# Altium PCB MainboardPCB.PcbDoc
Units mil, origin at the board's own origin, x right, y up, seen from the top; angles counter-clockwise.
Board outline 13697.5 x 3947.5 mil, 2 copper layers (Top Layer, Bottom Layer), stack 38.189 mil thick; 192 components, 125 nets, 843 pads, 0 vias.
Unrouted connection lines stored in the file: 319.
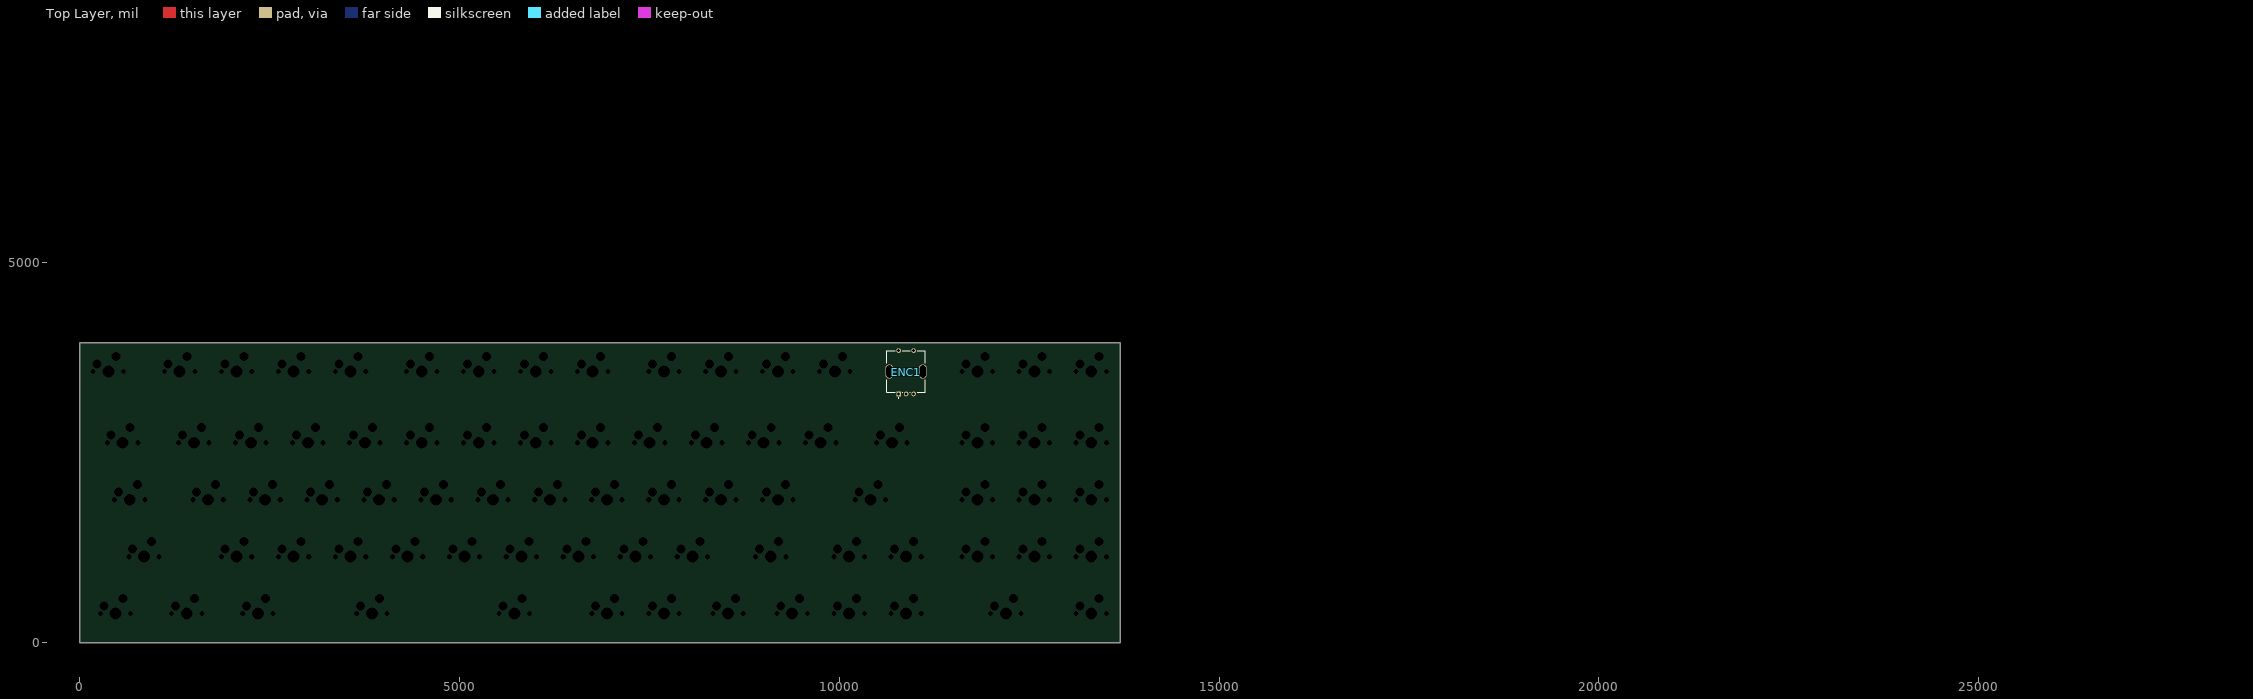
[diagram p0: Top Layer view]
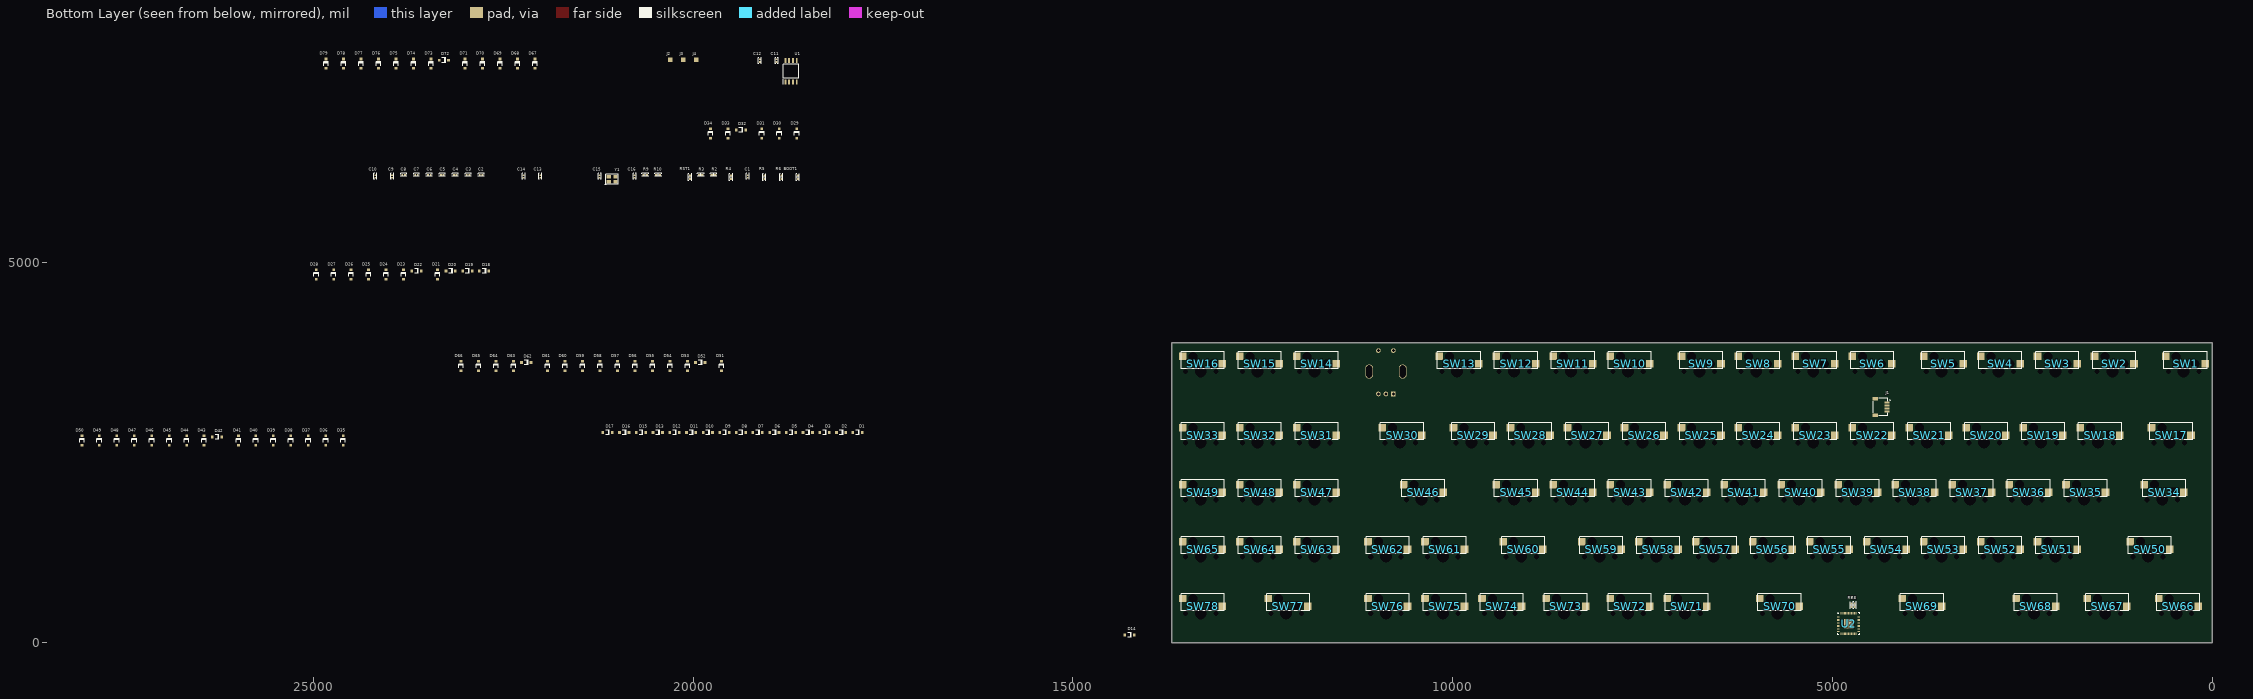
[diagram p1: Bottom Layer view, seen from below]

## Layer stack, top to bottom
Top Solder: solder mask 0.8, Solder Resist, Dk 3.8
Top Layer: signal copper 1.378
Dielectric: core 35.433, FR-4, Dk 4.6
Bottom Layer: signal copper 1.378
Bottom Solder: solder mask 0.8, Solder Resist, Dk 3.8

## Board outline
0,0 0,3947.5 13697.5,3947.5 13697.5,0

## Design rules (kind name [scope] priority, off if disabled: settings)
BoardOutlineClearance [All] p1: gap=7.87 ignorepadtopadclearanceinfootprint=FALSE
Clearance [All] p1: gap=5 ignorepadtopadclearanceinfootprint=FALSE except(9.84: Arc-Hole Track-Hole SMDPad-Hole THPad-Hole Via-Hole Fill-Hole Poly-Hole Region-Hole Text-Hole)
ComponentClearance [All] p1: gap=5 collisioncheckmode=3 verticalgap=5 showdistances=TRUE
DiffPairsRouting DiffPairsRouting_USB [InDifferentialPairClass('USB_Lines')] p1: maxlimit=6 minlimit=6 mostfreqgap=6 toplayer_minwidth=8 toplayer_maxwidth=31.5 toplayer_prefwidth=19.81 bottomlayer_minwidth=8 bottomlayer_maxwidth=31.5 bottomlayer_prefwidth=19.81 impedanceprofiledriven=TRUE impedanceprofileid={2B0FFD2A-F9F9-4E3F-BCA0-48B2AC724217} impedanceprofilevalue=90.000000 maxuncoupledlength=500
DiffPairsRouting [All] p2: maxlimit=10 minlimit=5 mostfreqgap=5 toplayer_minwidth=5 toplayer_maxwidth=1000 toplayer_prefwidth=5 bottomlayer_minwidth=5 bottomlayer_maxwidth=1000 bottomlayer_prefwidth=5 maxuncoupledlength=500
Height [All] p1: minheight=0 maxheight=71497.94 prefheight=500
HoleSize [All] p1: absolutevalues=TRUE maxlimit=248.03 minlimit=11.81 maxpercent=80.000 minpercent=20.000
HoleToHoleClearance [All] p1: gap=9.84 allowstackedmicrovias=FALSE
MinimumAnnularRing [All] p1: minimumring=3
MinimumSolderMaskSliver [All] p1: minsoldermaskwidth=0
PlaneClearance [All] p1: clearance=5
PlaneConnect PlaneConnectPowerPads [InPadClass('PowerPads')] p1: planeconnectstyle=Direct reliefexpansion=20 reliefentries=4 reliefconductorwidth=10 reliefairgap=10
PlaneConnect [All] p2: pad.planeconnectstyle=Relief pad.reliefexpansion=11.81 pad.reliefentries=4 pad.reliefconductorwidth=5 pad.reliefairgap=5 via.planeconnectstyle=Direct via.reliefexpansion=11.81 via.reliefentries=4 via.reliefconductorwidth=5 via.reliefairgap=5
PolygonConnect PolygonConnectPowerPads [All vs (InPadClass('PowerPads'))] p1: connectstyle=Direct reliefconductorwidth=10 reliefentries=4 polygonreliefangle="90 Angle" airgapwidth=10
PolygonConnect [All] p2: thpad.connectstyle=Relief thpad.reliefconductorwidth=5 thpad.reliefentries=4 thpad.polygonreliefangle="90 Angle" thpad.airgapwidth=5 smdpad.connectstyle=Relief smdpad.reliefconductorwidth=5 smdpad.reliefentries=4 smdpad.polygonreliefangle="90 Angle" smdpad.airgapwidth=5 via.connectstyle=Direct via.reliefconductorwidth=5 via.reliefentries=4 via.polygonreliefangle="90 Angle" via.airgapwidth=5
RoutingVias [All] p1: holewidth=11.81 width=23.62 viastyle="Through Hole" minholewidth=11.81 minwidth=23.62 maxholewidth=23.62 maxwidth=259.84
SilkToSilkClearance [All] p1: silktosilkclearance=0
SilkToSolderMaskClearance [IsPad] p1: minsilkscreentomaskgap=5 clearancetoexposedcopper=TRUE
SolderMaskExpansion [All] p1: expansion=2.95 istentingtop=FALSE
UnRoutedNet [All] p1: checkbadconnections=TRUE
Width [All] p1: maxlimit=1000 minlimit=5 preferedwidth=8 minimp=50.000000 maximp=50.000000 favimp=50.000000
19 further rules are at their usual default settings.

## Classes and differential pairs
net class USB_CON: USB_CONN_N USB_CONN_P
differential pair class USB_Lines: USB USB_CONN USB_TVS
differential pair USB_CONN: +USB_CONN_P -USB_CONN_N

## Components (designator, comment, footprint, x,y, rotation, side; value= is the part's Value field where it differs from the comment)
BOOT1 "0" "RES 0402_1005" 18620,6125 r90 bottom
C1 "100nF" "CAP 0402_1005" 19280,6135 r90 bottom
C2 "100nF" "CAP 0402_1005" 22790,6155 r180 bottom
C3 "100nF" "CAP 0402_1005" 22960,6155 r180 bottom
C4 "100nF" "CAP 0402_1005" 23130,6155 r180 bottom
C5 "100nF" "CAP 0402_1005" 23300,6155 r180 bottom
C6 "100nF" "CAP 0402_1005" 23470,6155 r180 bottom
C7 "100nF" "CAP 0402_1005" 23640,6155 r180 bottom
C8 "100nF" "CAP 0402_1005" 23810,6155 r180 bottom
C9 "100nF" "CAP 0402_1005" 23960,6135 r90 bottom
C10 "100nF" "CAP 0402_1005" 24180,6135 r90 bottom
C11 "10nF" "CAP 0402_1005" 18900,7660 r90 bottom
C12 "10nF" "CAP 0402_1005" 19120,7660 r90 bottom
C13 "1µF" "CAP 0402_1005" 22010,6135 r90 bottom
C14 "1µF" "CAP 0402_1005" 22230,6135 r90 bottom
C15 "27pF" "CAP 0402_1005" 21230,6135 r90 bottom
C16 "27pF" "CAP 0402_1005" 20770,6135 r90 bottom
D1 "1N4148W-7-F" DIOD-SOD123-2_V 17835,2765 r180 bottom
D2 "1N4148W-7-F" DIOD-SOD123-2_V 18050,2765 r180 bottom
D3 "1N4148W-7-F" DIOD-SOD123-2_V 18270,2765 r180 bottom
D4 "1N4148W-7-F" DIOD-SOD123-2_V 18490,2765 r180 bottom
D5 "1N4148W-7-F" DIOD-SOD123-2_V 18710,2765 r180 bottom
D6 "1N4148W-7-F" DIOD-SOD123-2_V 18930,2765 r180 bottom
D7 "1N4148W-7-F" DIOD-SOD123-2_V 19150,2765 r180 bottom
D8 "1N4148W-7-F" DIOD-SOD123-2_V 19370,2765 r180 bottom
D9 "1N4148W-7-F" DIOD-SOD123-2_V 19585,2765 r180 bottom
D10 "1N4148W-7-F" DIOD-SOD123-2_V 19805,2765 r180 bottom
D11 "1N4148W-7-F" DIOD-SOD123-2_V 20025,2765 r180 bottom
D12 "1N4148W-7-F" DIOD-SOD123-2_V 20245,2765 r180 bottom
D13 "1N4148W-7-F" DIOD-SOD123-2_V 20465,2765 r180 bottom
D14 "1N4148W-7-F" DIOD-SOD123-2_V 14255,97.5 r180 bottom
D15 "1N4148W-7-F" DIOD-SOD123-2_V 20685,2765 r180 bottom
D16 "1N4148W-7-F" DIOD-SOD123-2_V 20905,2765 r180 bottom
D17 "1N4148W-7-F" DIOD-SOD123-2_V 21125,2765 r180 bottom
D18 "1N4148W-7-F" DIOD-SOD123-2_V 22750,4890 r180 bottom
D19 "1N4148W-7-F" DIOD-SOD123-2_V 22970,4890 r180 bottom
D20 "1N4148W-7-F" DIOD-SOD123-2_V 23190,4890 r180 bottom
D21 "1N4148W-7-F" DIOD-SOD123-2_V 23365,4845 r90 bottom
D22 "1N4148W-7-F" DIOD-SOD123-2_V 23640,4890 r180 bottom
D23 "1N4148W-7-F" DIOD-SOD123-2_V 23810,4845 r90 bottom
D24 "1N4148W-7-F" DIOD-SOD123-2_V 24040,4845 r90 bottom
D25 "1N4148W-7-F" DIOD-SOD123-2_V 24270,4845 r90 bottom
D26 "1N4148W-7-F" DIOD-SOD123-2_V 24500,4845 r90 bottom
D27 "1N4148W-7-F" DIOD-SOD123-2_V 24730,4845 r90 bottom
D28 "1N4148W-7-F" DIOD-SOD123-2_V 24960,4845 r90 bottom
D29 "1N4148W-7-F" DIOD-SOD123-2_V 18635,6700 r90 bottom
D30 "1N4148W-7-F" DIOD-SOD123-2_V 18865,6700 r90 bottom
D31 "1N4148W-7-F" DIOD-SOD123-2_V 19095,6700 r90 bottom
D32 "1N4148W-7-F" DIOD-SOD123-2_V 19370,6745 r180 bottom
D33 "1N4148W-7-F" DIOD-SOD123-2_V 19540,6700 r90 bottom
D34 "1N4148W-7-F" DIOD-SOD123-2_V 19770,6700 r90 bottom
D35 "1N4148W-7-F" DIOD-SOD123-2_V 24605,2660 r90 bottom
D36 "1N4148W-7-F" DIOD-SOD123-2_V 24835,2660 r90 bottom
D37 "1N4148W-7-F" DIOD-SOD123-2_V 25065,2660 r90 bottom
D38 "1N4148W-7-F" DIOD-SOD123-2_V 25295,2660 r90 bottom
D39 "1N4148W-7-F" DIOD-SOD123-2_V 25525,2660 r90 bottom
D40 "1N4148W-7-F" DIOD-SOD123-2_V 25755,2660 r90 bottom
D41 "1N4148W-7-F" DIOD-SOD123-2_V 25985,2660 r90 bottom
D42 "1N4148W-7-F" DIOD-SOD123-2_V 26265,2705 r180 bottom
D43 "1N4148W-7-F" DIOD-SOD123-2_V 26435,2660 r90 bottom
D44 "1N4148W-7-F" DIOD-SOD123-2_V 26665,2660 r90 bottom
D45 "1N4148W-7-F" DIOD-SOD123-2_V 26895,2660 r90 bottom
D46 "1N4148W-7-F" DIOD-SOD123-2_V 27125,2660 r90 bottom
D47 "1N4148W-7-F" DIOD-SOD123-2_V 27355,2660 r90 bottom
D48 "1N4148W-7-F" DIOD-SOD123-2_V 27585,2660 r90 bottom
D49 "1N4148W-7-F" DIOD-SOD123-2_V 27815,2660 r90 bottom
D50 "1N4148W-7-F" DIOD-SOD123-2_V 28045,2660 r90 bottom
D51 "1N4148W-7-F" DIOD-SOD123-2_V 19625,3640 r90 bottom
D52 "1N4148W-7-F" DIOD-SOD123-2_V 19905,3685 r180 bottom
D53 "1N4148W-7-F" DIOD-SOD123-2_V 20075,3640 r90 bottom
D54 "1N4148W-7-F" DIOD-SOD123-2_V 20305,3640 r90 bottom
D55 "1N4148W-7-F" DIOD-SOD123-2_V 20535,3640 r90 bottom
D56 "1N4148W-7-F" DIOD-SOD123-2_V 20765,3640 r90 bottom
D57 "1N4148W-7-F" DIOD-SOD123-2_V 20995,3640 r90 bottom
D58 "1N4148W-7-F" DIOD-SOD123-2_V 21225,3640 r90 bottom
D59 "1N4148W-7-F" DIOD-SOD123-2_V 21455,3640 r90 bottom
D60 "1N4148W-7-F" DIOD-SOD123-2_V 21685,3640 r90 bottom
D61 "1N4148W-7-F" DIOD-SOD123-2_V 21915,3640 r90 bottom
D62 "1N4148W-7-F" DIOD-SOD123-2_V 22195,3685 r180 bottom
D63 "1N4148W-7-F" DIOD-SOD123-2_V 22365,3640 r90 bottom
D64 "1N4148W-7-F" DIOD-SOD123-2_V 22595,3640 r90 bottom
D65 "1N4148W-7-F" DIOD-SOD123-2_V 22825,3640 r90 bottom
D66 "1N4148W-7-F" DIOD-SOD123-2_V 23055,3640 r90 bottom
D67 "1N4148W-7-F" DIOD-SOD123-2_V 22080,7620 r90 bottom
D68 "1N4148W-7-F" DIOD-SOD123-2_V 22310,7620 r90 bottom
D69 "1N4148W-7-F" DIOD-SOD123-2_V 22540,7620 r90 bottom
D70 "1N4148W-7-F" DIOD-SOD123-2_V 22770,7620 r90 bottom
D71 "1N4148W-7-F" DIOD-SOD123-2_V 23000,7620 r90 bottom
D72 "1N4148W-7-F" DIOD-SOD123-2_V 23280,7665 r180 bottom
D73 "1N4148W-7-F" DIOD-SOD123-2_V 23450,7620 r90 bottom
D74 "1N4148W-7-F" DIOD-SOD123-2_V 23680,7620 r90 bottom
D75 "1N4148W-7-F" DIOD-SOD123-2_V 23910,7620 r90 bottom
D76 "1N4148W-7-F" DIOD-SOD123-2_V 24140,7620 r90 bottom
D77 "1N4148W-7-F" DIOD-SOD123-2_V 24370,7620 r90 bottom
D78 "1N4148W-7-F" DIOD-SOD123-2_V 24600,7620 r90 bottom
D79 "1N4148W-7-F" DIOD-SOD123-2_V 24830,7620 r90 bottom
ENC1 "PEC12R-4220F-S0024" FP-PEC12R-4220F-S0024-MFG 10880,3567.5 r0 top
J1 "SM04B-SRSS-TB_LF__SN_" SM04B-SRSS-TB(LFSN) 4468.5,3218.43 r270 bottom
J2 "Pad" Square_Pad 20300,7670 r180 bottom
J3 "Pad" Square_Pad 20130,7670 r180 bottom
J4 "Pad" Square_Pad 19960,7670 r180 bottom
R2 "10k" "RES 0402_1005" 19730,6155 r180 bottom
R3 "10k" "RES 0402_1005" 19900,6155 r180 bottom
R4 "10k" "RES 0402_1005" 19500,6125 r90 bottom
R5 "10k" "RES 0402_1005" 19060,6125 r90 bottom
R6 "1k" "RES 0402_1005" 18840,6125 r90 bottom
R7 "27R" "RES 0402_1005" 4750,492.5 r90 bottom
R8 "27R" "RES 0402_1005" 4710,492.5 r90 bottom
R9 "1k" "RES 0402_1005" 20630,6155 r180 bottom
R10 "10k" "RES 0402_1005" 20460,6155 r180 bottom
RST1 "0" "RES 0402_1005" 20040,6125 r90 bottom
SW1 "CPG151101S11" CPG151101S11 380,3567.5 r0 top
SW2 "CPG151101S11" CPG151101S11 1317.5,3567.5 r0 top
SW3 "CPG151101S11" CPG151101S11 2067.5,3567.5 r0 top
SW4 "CPG151101S11" CPG151101S11 2817.5,3567.5 r0 top
SW5 "CPG151101S11" CPG151101S11 3567.5,3567.5 r0 top
SW6 "CPG151101S11" CPG151101S11 4505,3567.5 r0 top
SW7 "CPG151101S11" CPG151101S11 5255,3567.5 r0 top
SW8 "CPG151101S11" CPG151101S11 6005,3567.5 r0 top
SW9 "CPG151101S11" CPG151101S11 6755,3567.5 r0 top
SW10 "CPG151101S11" CPG151101S11 7692.5,3567.5 r0 top
SW11 "CPG151101S11" CPG151101S11 8442.5,3567.5 r0 top
SW12 "CPG151101S11" CPG151101S11 9192.5,3567.5 r0 top
SW13 "CPG151101S11" CPG151101S11 9942.5,3567.5 r0 top
SW14 "CPG151101S11" CPG151101S11 11817.5,3567.5 r0 top
SW15 "CPG151101S11" CPG151101S11 12567.5,3567.5 r0 top
SW16 "CPG151101S11" CPG151101S11 13317.5,3567.5 r0 top
SW17 "CPG151101S11" CPG151101S11 567.5,2630 r0 top
SW18 "CPG151101S11" CPG151101S11 1505,2630 r0 top
SW19 "CPG151101S11" CPG151101S11 2255,2630 r0 top
SW20 "CPG151101S11" CPG151101S11 3005,2630 r0 top
SW21 "CPG151101S11" CPG151101S11 3755,2630 r0 top
SW22 "CPG151101S11" CPG151101S11 4505,2630 r0 top
SW23 "CPG151101S11" CPG151101S11 5255,2630 r0 top
SW24 "CPG151101S11" CPG151101S11 6005,2630 r0 top
SW25 "CPG151101S11" CPG151101S11 6755,2630 r0 top
SW26 "CPG151101S11" CPG151101S11 7505,2630 r0 top
SW27 "CPG151101S11" CPG151101S11 8255,2630 r0 top
SW28 "CPG151101S11" CPG151101S11 9005,2630 r0 top
SW29 "CPG151101S11" CPG151101S11 9755,2630 r0 top
SW30 "CPG151101S11" CPG151101S11 10692.5,2630 r0 top
SW31 "CPG151101S11" CPG151101S11 11817.5,2630 r0 top
SW32 "CPG151101S11" CPG151101S11 12567.5,2630 r0 top
SW33 "CPG151101S11" CPG151101S11 13317.5,2630 r0 top
SW34 "CPG151101S11" CPG151101S11 661.25,1880 r0 top
SW35 "CPG151101S11" CPG151101S11 1692.5,1880 r0 top
SW36 "CPG151101S11" CPG151101S11 2442.5,1880 r0 top
SW37 "CPG151101S11" CPG151101S11 3192.5,1880 r0 top
SW38 "CPG151101S11" CPG151101S11 3942.5,1880 r0 top
SW39 "CPG151101S11" CPG151101S11 4692.5,1880 r0 top
SW40 "CPG151101S11" CPG151101S11 5442.5,1880 r0 top
SW41 "CPG151101S11" CPG151101S11 6192.5,1880 r0 top
SW42 "CPG151101S11" CPG151101S11 6942.5,1880 r0 top
SW43 "CPG151101S11" CPG151101S11 7692.5,1880 r0 top
SW44 "CPG151101S11" CPG151101S11 8442.5,1880 r0 top
SW45 "CPG151101S11" CPG151101S11 9192.5,1880 r0 top
SW46 "CPG151101S11" CPG151101S11 10411.25,1880 r0 top
SW47 "CPG151101S11" CPG151101S11 11817.5,1880 r0 top
SW48 "CPG151101S11" CPG151101S11 12567.5,1880 r0 top
SW49 "CPG151101S11" CPG151101S11 13317.5,1880 r0 top
SW50 "CPG151101S11" CPG151101S11 848.75,1130 r0 top
SW51 "CPG151101S11" CPG151101S11 2067.5,1130 r0 top
SW52 "CPG151101S11" CPG151101S11 2817.5,1130 r0 top
SW53 "CPG151101S11" CPG151101S11 3567.5,1130 r0 top
SW54 "CPG151101S11" CPG151101S11 4317.5,1130 r0 top
SW55 "CPG151101S11" CPG151101S11 5067.5,1130 r0 top
SW56 "CPG151101S11" CPG151101S11 5817.5,1130 r0 top
SW57 "CPG151101S11" CPG151101S11 6567.5,1130 r0 top
SW58 "CPG151101S11" CPG151101S11 7317.5,1130 r0 top
SW59 "CPG151101S11" CPG151101S11 8067.5,1130 r0 top
SW60 "CPG151101S11" CPG151101S11 9098.75,1130 r0 top
SW61 "CPG151101S11" CPG151101S11 10130,1130 r0 top
SW62 "CPG151101S11" CPG151101S11 10880,1130 r0 top
SW63 "CPG151101S11" CPG151101S11 11817.5,1130 r0 top
SW64 "CPG151101S11" CPG151101S11 12567.5,1130 r0 top
SW65 "CPG151101S11" CPG151101S11 13317.5,1130 r0 top
SW66 "CPG151101S11" CPG151101S11 473.75,380 r0 top
SW67 "CPG151101S11" CPG151101S11 1411.25,380 r0 top
SW68 "CPG151101S11" CPG151101S11 2348.75,380 r0 top
SW69 "CPG151101S11" CPG151101S11 3848.75,380 r0 top
SW70 "CPG151101S11" CPG151101S11 5723.75,380 r0 top
SW71 "CPG151101S11" CPG151101S11 6942.5,380 r0 top
SW72 "CPG151101S11" CPG151101S11 7692.5,380 r0 top
SW73 "CPG151101S11" CPG151101S11 8536.25,380 r0 top
SW74 "CPG151101S11" CPG151101S11 9380,380 r0 top
SW75 "CPG151101S11" CPG151101S11 10130,380 r0 top
SW76 "CPG151101S11" CPG151101S11 10880,380 r0 top
SW77 "CPG151101S11" CPG151101S11 12192.5,380 r0 top
SW78 "CPG151101S11" CPG151101S11 13317.5,380 r0 top
U1 "W25Q128JVSIQ_TR" SOIC127P780X195-8N 18710,7520 r90 bottom
U2 "RP2040" RP2040_QFN56 4790.34,249.63 r180 bottom
Y1 "12MHz" "ABRACON ABM8G" 21065,6100 r180 bottom

## Footprints (in the part's own frame and the unit in brackets; to place one, negate y for a bottom-side part, rotate by r counter-clockwise, add the part's x,y. Pads: shape width x height; smd on the part's side, far side on the other; paste and mask are expansions set on the pad)
"ABRACON ABM8G" [mm] "Crystal, 4-Leads, Body 2.50x3.20mm, Pitch 2.20mm, IPC Medium Density"
  rect 1.4x1.2 smd: 1(-1.1,-0.85) 2(1.1,-0.85) 3(1.1,0.85) 4(-1.1,0.85)
  silkscreen extent -2.25,-1.85 2.1,1.7, body extent -1.61,-1.26 1.61,1.26, height 0.6
"CAP 0402_1005" [mm] "Chip Capacitor, 2-Leads, Body 1.02x0.51mm, IPC Medium Density"
  rect 0.6x0.64 smd: 1(-0.44,0) 2(0.44,0)
  silkscreen extent -1,-0.5 1,0.5, body extent -0.5,-0.26 0.5,0.26, height 0.52
CPG151101S11 [mm]
  rect 2.55x2.5 smd far side: 1(-7.239,2.54) 2(5.969,5.08)
  round 0.851 hole 1.702 unplated: MH1(-5.08,0) MH2(5.08,0)
  round 1.994 hole 3.988 unplated: MH3(0,0)
  round 1.5 hole 3 unplated: MH4(-3.81,2.54) MH5(2.54,5.08)
  body extent -7.83,0.99 6.56,6.63, height 1.73
DIOD-SOD123-2_V [mm] "SOD123, 2-Leads, Body 2.7x1.55mm, Height 1.45mm"
  rect 0.9x0.95 smd: 1(-1.575,0) 2(1.575,0)
  silkscreen extent -0.64,-0.82 0.64,0.77, body extent -1.35,-0.77 1.35,0.77, height 1.45
FP-PEC12R-4220F-S0024-MFG [mm]
  round 1.55 hole 1 paste-1000 mask+0: 1(-2.5,7) 2(2.5,7) B(2.5,-7.5) C(0,-7.5)
  rrect100% 2.6x4.7 hole 4.1 slot 2 at 0 deg paste-1000 mask+0: 3(-5.6,0) 4(5.6,0)
  rect 1.55x1.55 hole 1 paste-1000 mask+0: A(-2.5,-7.5)
  silkscreen extent -6.45,-8.95 6.45,6.95, body extent -6.84,-7.67 6.83,7.13, height 20.5
"RES 0402_1005" [mm] "Chip Resistor, 2-Leads, Body 1.0x0.5mm, IPC Medium Density"
  rect 0.75x0.6 smd: 1(-0.575,0) 2(0.575,0)
  silkscreen extent -1.14,-0.51 1.14,0.51, body extent -0.5,-0.25 0.5,0.25, height 0.35
RP2040_QFN56 [mm] "QFN, 56-Leads, Body 7x7mm, Pitch 1mm, Thermal Pad 3.5x3.5mm"
  oval 0.875x0.2 smd: 1(-3.437,2.6) 2(-3.437,2.2) 3(-3.437,1.8) 4(-3.437,1.4) 5(-3.437,1) 6(-3.437,0.6) 7(-3.437,0.2) 8(-3.437,-0.2) 9(-3.437,-0.6) 10(-3.437,-1) 11(-3.437,-1.4) 12(-3.437,-1.8) 13(-3.437,-2.2) 14(-3.437,-2.6) 29(3.438,-2.6) 30(3.438,-2.2) 31(3.438,-1.8) 32(3.438,-1.4) 33(3.438,-1) 34(3.438,-0.6) 35(3.438,-0.2) 36(3.438,0.2) 37(3.438,0.6) 38(3.438,1) 39(3.438,1.4) 40(3.438,1.8) 41(3.438,2.2) 42(3.438,2.6)
  oval 0.2x0.875 smd: 15(-2.601,-3.437) 16(-2.201,-3.437) 17(-1.801,-3.437) 18(-1.401,-3.437) 19(-1.001,-3.437) 20(-0.601,-3.437) 21(-0.201,-3.437) 22(0.199,-3.437) 23(0.599,-3.437) 24(0.999,-3.437) 25(1.399,-3.437) 26(1.799,-3.437) 27(2.199,-3.437) 28(2.599,-3.437) 43(2.599,3.438) 44(2.199,3.438) 45(1.799,3.438) 46(1.399,3.438) 47(0.999,3.438) 48(0.599,3.438) 49(0.199,3.438) 50(-0.201,3.438) 51(-0.601,3.438) 52(-1.001,3.438) 53(-1.401,3.438) 54(-1.801,3.438) 55(-2.201,3.438) 56(-2.601,3.438)
  rect 3.2x3.2 smd: 57(0,0)
  silkscreen extent -3.69,-3.69 3.69,3.69, body extent -3.5,-3.5 3.5,3.5, height 0.9
SM04B-SRSS-TB(LFSN) [mm]
  rect 0.6x1.55 smd: 1(1.5,4.661) 2(2.5,4.661) 3(3.5,4.661) 4(4.5,4.661)
  rect 1.2x1.8 smd: 5(0.2,0.786) 6(5.8,0.786)
  silkscreen extent 0,0 6,5.7, body extent 0,0.28 6,5.23, height 2.97
SOIC127P780X195-8N [mm]
  rect 1.6x0.65 smd: 1(-3.55,1.905) 2(-3.55,0.635) 3(-3.55,-0.635) 4(-3.55,-1.905) 5(3.55,-1.905) 6(3.55,-0.635) 7(3.55,0.635) 8(3.55,1.905)
  silkscreen extent -4.35,-2.62 2.4,2.62, body extent -3.9,-2.62 3.9,2.62, height 1.95
Square_Pad [mil] "Square SMD pad"
  rect 60x60 smd: 0(0,0)

## Part data
BOOT1 RST1: library part CR0402AJ/-000GAS, "RESA-AS 0402 0R JUMPER 63MW", Device Package="0402 (1005 Metric)", manufacturer="Bourns Inc.", Operating Temperature="-55°C ~ 155°C", Power (Watts)="0.063W, 1/16W", Ratings=AEC-Q200, Resistance="0 Ohms", Supplier Device Package=0402, Supplier Part Number 1=CR0402AJ/-000GASCT-ND, Tolerance=Jumper, componentlink1description=Datasheet, componentlink1url=//media.digikey.com/pdf/Data%20Sheets/Bourns%20PDFs/CRyyyyA-AS_Model_DS.pdf, componentlink2description="DigiKey Link", componentlink2url=https://www.digikey.com/en/products/detail/bourns-inc/CR0402AJ-000GAS/10240110, Composition="Thick Film", Features="Anti-Sulfur, Automotive AEC-Q200, Moisture Resistant", Height - Seated (Max)="0.015\" (0.37mm)", lastupdated="11.08.2022 09:07:57", Lifecycle Status=Active, Minimum Order=1, Number of Terminations=2, Package / Case="0402 (1005 Metric)", packaging=CutTape, Part Number=CR0402AJ/-000GAS, Part Status=Active, partid=7106, price=0.01, series=CR0402A-AS, Size / Dimension="0.039\" L x 0.020\" W (1.00mm x 0.50mm)", Supplier 1=DigiKey
C1 C2 C3 C4 C5 C6 C7 C8 C9 C10: library part C0402C104K4RECAUTO, "CAP CER 0402 0.1UF 16V X7R 10%", Capacitance="0.1 µF", Device Package="0402 (1005 Metric)", manufacturer=KEMET, Operating Temperature="-55°C ~ 125°C", Ratings=AEC-Q200, Supplier Part Number 1=399-17167-1-ND, Temperature Coefficient=X7R, Tolerance=±10%, Voltage - Rated=16V, Applications="Automotive, ESD Protection", componentlink1description=Datasheet, componentlink1url=https://api.kemet.com/component-edge/download/datasheet/C0402C104K4RECAUTO.pdf, componentlink2description="DigiKey Link", componentlink2url=https://www.digikey.com/en/products/detail/kemet/C0402C104K4RECAUTO/8563695, lastupdated="11.08.2022 08:52:24", Lifecycle Status=Active, Minimum Order=1, Mounting Type="Surface Mount, MLCC", Package / Case="0402 (1005 Metric)", packaging=TapeAndReel, Part Number=C0402C104K4RECAUTO, Part Status=Active, partid=1731, price=0.02, series="ESD SMD Auto X7R", Size / Dimension="0.039\" L x 0.020\" W (1.00mm x 0.50mm)", Supplier 1=DigiKey, Thickness (Max)="0.022\" (0.55mm)"
C11 C12: library part C0402C103J5RECAUTO, "CAP CER 0402 10NF 50V X7R 5%", Device Package="0402 (1005 Metric)", manufacturer=KEMET, Operating Temperature="-55°C ~ 125°C", Ratings=AEC-Q200, Supplier Part Number 1=399-C0402C103J5RECAUTOCT-ND, Temperature Coefficient=X7R, Tolerance=±5%, Voltage - Rated=50V, Applications="Automotive, ESD Protection", Capacitance=10nF, componentlink1description=Datasheet, componentlink1url=https://api.kemet.com/component-edge/download/datasheet/C0402C103J5RECAUTO.pdf, componentlink2description="DigiKey Link", componentlink2url=https://www.digikey.com/en/products/detail/kemet/C0402C103J5RECAUTO/8646448, lastupdated="9.08.2022 12:00:55", Lifecycle Status=Active, Minimum Order=1, Mounting Type="Surface Mount, MLCC", Package / Case="0402 (1005 Metric)", packaging=TapeAndReel, Part Number=C0402C103J5RECAUTO, Part Status=Active, partid=33153, price=0.02, series="ESD SMD Auto X7R", Size / Dimension="0.039\" L x 0.020\" W (1.00mm x 0.50mm)", Supplier 1=DigiKey, Thickness (Max)="0.022\" (0.55mm)"
C13 C14: library part GRM155C71A105KE11D, "CAP CER 1UF 10V X7S 0402", Capacitance="1 µF", Device Package="0402 (1005 Metric)", manufacturer="Murata Electronics", Operating Temperature="-55°C ~ 125°C", Supplier Part Number 1=490-14457-1-ND, Temperature Coefficient=X7S, Tolerance=±10%, Voltage - Rated=10V, Applications="General Purpose", componentlink1description=Datasheet, componentlink1url=https://search.murata.co.jp/Ceramy/image/img/A01X/G101/ENG/GRM155C71A105KE11-01.pdf, componentlink2description="DigiKey Link", componentlink2url=https://www.digikey.com/en/products/detail/murata-electronics/GRM155C71A105KE11D/6606086, lastupdated="11.08.2022 08:52:24", Lifecycle Status=Active, Minimum Order=1, Mounting Type="Surface Mount, MLCC", Package / Case="0402 (1005 Metric)", packaging=TapeAndReel, Part Number=GRM155C71A105KE11D, Part Status=Active, partid=1749, price=0.01, series=GRM, Size / Dimension="0.039\" L x 0.020\" W (1.00mm x 0.50mm)", Supplier 1=DigiKey, Thickness (Max)="0.024\" (0.60mm)"
C15 C16: library part C0402C270J3GAC7867, "CAP CER 27PF 25V NP0 0402", Capacitance="27 pF", Device Package="0402 (1005 Metric)", manufacturer=KEMET, Operating Temperature="-55°C ~ 125°C", Supplier Part Number 1=399-14437-1-ND, Temperature Coefficient="C0G, NP0", Tolerance=±5%, Voltage - Rated=25V, Applications="General Purpose", componentlink1description=Datasheet, componentlink1url=https://api.kemet.com/component-edge/download/datasheet/C0402C270J3GACTU.pdf, componentlink2description="DigiKey Link", componentlink2url=https://www.digikey.com/en/products/detail/kemet/C0402C270J3GAC7867/2196521, Features="Low ESL", lastupdated="11.08.2022 08:52:24", Lifecycle Status=Active, Minimum Order=1, Mounting Type="Surface Mount, MLCC", Package / Case="0402 (1005 Metric)", packaging=TapeAndReel, Part Number=C0402C270J3GAC7867, Part Status=Active, partid=1740, price=0.06, series="SMD Comm C0G", Size / Dimension="0.039\" L x 0.020\" W (1.00mm x 0.50mm)", Supplier 1=DigiKey, Thickness (Max)="0.022\" (0.55mm)"
D1 D2 D3 D4 D5 D6 D7 D8 D9 D10 D11 D12 D13 D14 D15 D16 D17 D18 D19 D20 D21 D22 D23 D24 D25 D26 D27 D28 D29 D30 D31 D32 D33 D34 D35 D36 D37 D38 D39 D40 D41 D42 D43 D44 D45 D46 D47 D48 D49 D50 D51 D52 D53 D54 D55 D56 D57 D58 D59 D60 D61 D62 D63 D64 D65 D66 D67 D68 D69 D70 D71 D72 D73 D74 D75 D76 D77 D78 D79: library part CMP-2000-04932-2, "Fast Switching Diode, 100 V, 0.15 A, -65 to 150 degC, 2-Pin?SOD123, RoHS, Tape and Reel", manufacturer=DiodesIncorporated, Max Surge Current=2A, Maximum Operating Temperature=+150C, Minimum Operating Temperature=-65C, Operating Temperature Range=-65Cto+150C, Package / Case=SOD-123, Package Reference=SOD123-2, Peak Reverse Voltage=100V, Vf - Forward Voltage=1.25V, If - Forward Current=0.15A, Ir - Reverse Current=1uA, Brand=DiodesIncorporated, Configuration=Single, Datasheet URL=http://www.farnell.com/datasheets/1915529.pdf, Datasheet Version="Rev. 24-2, 10/2013", Factory Pack Quantity=3000, Height=1.25mm, Length=2.85mm, Manufacturer URL=http://www.diodes.com/, Mounting Style=SMD/SMT, Package URL=http://www.diodes.com/datasheets/ds18004.pdf, packaging=Reel, Product=SwitchingDiodes, Product Category=Diodes-GeneralPurpose,Power,Switching, Recovery Time=4ns, RoHS=True, series=1N4148, Type=SwitchingDiode, Unit Weight=0.000353oz, Width=1.7mm
ENC1: library part CMP-07421-000021-1, "ROTARY ENCODER MECHANICAL 24PPR", Max Operating Temperature=70°C, Max Supply Voltage (DC)=5V, Min Operating Temperature=-30°C, Package Quantity=150, Built in Switch=Yes, Detent=Yes, Encoder Type=Mechanical, Height=13.4mm, Hole Diameter=2mm, Length=26mm, Mount="Through Hole", Number of Channels=2, Orientation=Vertical, Output Type=Quadrature, packaging=Bulk, Pulses per Revolution=24, REACH SVHC="No SVHC", RoHS Compliant=Yes, series=PEC12R, Termination="PC Pin", Width=12.5mm
J1: "Connector", Arrow Part Number=SM04B-SRSS-TB(LF)(SN), Manufacturer_Name="JST (JAPAN SOLDERLESS TERMINALS)", Arrow Price/Stock=https://www.arrow.com/en/products/sm04b-srss-tb-lf-sn/jst-manufacturing, Datasheet Link=http://www.jst-mfg.com/product/pdf/eng/eSH.pdf, Manufacturer_Part_Number=SM04B-SRSS-TB(LF)(SN)
R2 R3 R4 R5 R10: library part TNPW040210K0BETD, "RES 10K OHM 0.1% 1/16W 0402", Device Package="0402 (1005 Metric)", manufacturer="Vishay Dale", Operating Temperature="-55°C ~ 125°C", Power (Watts)="0.063W, 1/16W", Resistance="10 kOhms", Supplier Device Package=0402, Supplier Part Number 1=541-3559-1-ND, Temperature Coefficient=±25ppm/°C, Tolerance=±0.1%, componentlink1description=Datasheet, componentlink1url=http://www.vishay.com/docs/31006/tnpw.pdf, componentlink2description="DigiKey Link", componentlink2url=https://www.digikey.com/en/products/detail/vishay-dale/TNPW040210K0BETD/1613222, Composition="Thin Film", Features=Military, Height - Seated (Max)="0.016\" (0.40mm)", lastupdated="11.08.2022 09:08:10", Lifecycle Status=Active, Minimum Order=1, Number of Terminations=2, Package / Case="0402 (1005 Metric)", packaging=TapeAndReel, Part Number=TNPW040210K0BETD, Part Status=Active, partid=3021, price=0.26, series=TNPW, Size / Dimension="0.039\" L x 0.020\" W (1.00mm x 0.50mm)", Supplier 1=DigiKey
R6 R9: library part AT0402BRD071KL, "RES SMD 1K OHM 0.1% 1/16W 0402", Device Package="0402 (1005 Metric)", manufacturer=Yageo, Operating Temperature="-55°C ~ 155°C", Power (Watts)="0.063W, 1/16W", Ratings=AEC-Q200, Resistance="1 kOhms", Supplier Device Package=0402, Supplier Part Number 1=YAG2088CT-ND, Temperature Coefficient=±25ppm/°C, Tolerance=±0.1%, componentlink1description=Datasheet, componentlink1url=http://www.yageo.com/documents/recent/PYu-AT_51_RoHS_L_5.pdf, componentlink2description="DigiKey Link", componentlink2url=https://www.digikey.com/en/products/detail/yageo/AT0402BRD071KL/5138607, Composition="Thin Film", Features="Anti-Sulfur, Automotive AEC-Q200, Moisture Resistant", Height - Seated (Max)="0.014\" (0.35mm)", lastupdated="11.08.2022 09:08:11", Lifecycle Status=Active, Minimum Order=1, Number of Terminations=2, Package / Case="0402 (1005 Metric)", packaging=TapeAndReel, Part Number=AT0402BRD071KL, Part Status=Active, partid=2462, price=0.09, series=AT, Size / Dimension="0.039\" L x 0.020\" W (1.00mm x 0.50mm)", Supplier 1=DigiKey
R7 R8: library part RC0402FR-0727RL, "RES 27 OHM 1% 1/16W 0402", Device Package="0402 (1005 Metric)", manufacturer=Yageo, Operating Temperature="-55°C ~ 155°C", Power (Watts)="0.063W, 1/16W", Resistance="27 Ohms", Supplier Device Package=0402, Supplier Part Number 1=YAG3086CT-ND, Temperature Coefficient=±100ppm/°C, Tolerance=±1%, componentlink1description=Datasheet, componentlink1url=https://www.yageo.com/upload/media/product/productsearch/datasheet/rchip/PYu-RC_Group_51_RoHS_L_10.pdf, componentlink2description="DigiKey Link", componentlink2url=https://www.digikey.com/en/products/detail/yageo/RC0402FR-0727RL/5280946, Composition="Thick Film", Features="Moisture Resistant", Height - Seated (Max)="0.016\" (0.40mm)", lastupdated="11.08.2022 09:08:11", Lifecycle Status=Active, Minimum Order=1, Number of Terminations=2, Package / Case="0402 (1005 Metric)", packaging=CutTape, Part Number=RC0402FR-0727RL, Part Status=Active, partid=2558, price=0.01, series=RC_L, Size / Dimension="0.039\" L x 0.020\" W (1.00mm x 0.50mm)", Supplier 1=DigiKey
SW1 SW2 SW3 SW4 SW5 SW6 SW7 SW8 SW9 SW10 SW11 SW12 SW13 SW14 SW15 SW16 SW17 SW18 SW19 SW20 SW21 SW22 SW23 SW24 SW25 SW26 SW27 SW28 SW29 SW30 SW31 SW32 SW33 SW34 SW35 SW36 SW37 SW38 SW39 SW40 SW41 SW42 SW43 SW44 SW45 SW46 SW47 SW48 SW49 SW50 SW51 SW52 SW53 SW54 SW55 SW56 SW57 SW58 SW59 SW60 SW61 SW62 SW63 SW64 SW65 SW66 SW67 SW68 SW69 SW70 SW71 SW72 SW73 SW74 SW75 SW76 SW77 SW78: library part "CPG151101S11 - Kailh Hotswap Socket"
U1: "Inductor", Arrow Part Number="W25Q128JVSIQ TR", Manufacturer_Name=Winbond, Mouser Part Number=454-W25Q128JVSIQTR, Arrow Price/Stock=https://www.arrow.com/en/products/w25q128jvsiqtr/winbond-electronics?region=nac, Datasheet Link=http://www.winbond.com/resource-files/w25q128jv%20spi%20revc%2011162016.pdf, Height=1.95mm, Manufacturer_Part_Number="W25Q128JVSIQ TR", Mouser Price/Stock=https://www.mouser.co.uk/ProductDetail/Winbond/W25Q128JVSIQ-TR?qs=qSfuJ%252Bfl%2Fd7vTyLA9kNdGw%3D%3D
U2: "Raspberry Pi RP2040 Mcu, 32 Bit, 133MHZ, QFN-56;"
Y1: library part ABM8G-12.000MHZ-18-D2Y-T, "CRYSTAL 12.0000MHZ 18PF SMD", Device Package="4-SMD, No Lead", ESR (Equivalent Series Resistance)="120 Ohms", Frequency Stability=±30ppm, Frequency Tolerance=±20ppm, Load Capacitance=18pF, manufacturer="Abracon LLC", Operating Mode=Fundamental, Operating Temperature="-40°C ~ 85°C", Supplier Part Number 1=535-10261-1-ND, componentlink1description=Datasheet, componentlink1url=https://abracon.com/Resonators/ABM8G.pdf, componentlink2description="DigiKey Link", componentlink2url=http://digikey.com/product-detail/en/abracon-llc/ABM8G-12.000MHZ-18-D2Y-T/535-10261-1-ND/2218074, Frequency=12MHz, Height - Seated (Max)="0.039\" (1.00mm)", lastupdated="19.03.2020 22:36:25", Lifecycle Status=Active, Minimum Order=1, Mounting Type="Surface Mount", Package / Case="4-SMD, No Lead", packaging=TapeAndReel, Part Number=ABM8G-12.000MHZ-18-D2Y-T, Part Status=Active, partid=310, price=0.59, series=ABM8G, Size / Dimension="0.126\" L x 0.098\" W (3.20mm x 2.50mm)", Supplier 1=DigiKey, Type="MHz Crystal"

## Nets (pads, with @x,y where several pads share a name; then routed paths per layer and width w, separated by ;. In a path a pad name is that pad's centre, name@x,y a point inside that pad or via, vN(x,y) a via of type N, cw(c..) or ccw(c..) an arc to the next point about the centre after c; other vN are vias at no path point)
+1V1: C2.2 C3.2 C13.2 U2.23 U2.45 U2.50
+3V3: C1.2 C4.2 C5.2 C6.2 C7.2 C8.2 C9.2 C10.2 C14.2 J1.1 R2.1 R3.1 R10.1 U1.8 U2.1 U2.10 U2.22 U2.33 U2.42 U2.43 U2.44 U2.48 U2.49
Col1: D1.2 D18.2 D35.2 D51.2 D67.2 U2.34
Col2: D2.2 D19.2 D36.2 D52.2 D68.2 U2.35
Col3: D3.2 D20.2 D37.2 D53.2 D69.2 U2.36
Col4: D4.2 D21.2 D38.2 D54.2 D70.2 U2.37
Col5: D5.2 D22.2 D39.2 D55.2 U2.5
Col6: D6.2 D23.2 D40.2 D56.2 U2.4
Col7: D7.2 D24.2 D41.2 D57.2 D71.2 U2.3
Col8: D8.2 D25.2 D42.2 D58.2 D72.2 U2.2
Col9: D9.2 D26.2 D43.2 D59.2 D73.2 U2.32
Col10: D10.2 D27.2 D44.2 D60.2 D74.2 U2.29
Col11: D11.2 D28.2 D45.2 U2.28 U2.30
Col12: D12.2 D29.2 D46.2 D61.2 D75.2 U2.27 U2.31
Col13: D13.2 D30.2 D47.2 D62.2 D76.2 U2.18
Col14: D14.2 D31.2 D63.2 D77.2 U2.17
Col15: D15.2 D32.2 D48.2 D64.2 D78.2 U2.13
Col16: D16.2 D33.2 D49.2 D65.2 U2.12
Col17: D17.2 D34.2 D50.2 D66.2 D79.2 U2.11
ENCA: C11.2 R4.2 U2.15
ENCB: C12.2 R5.2 U2.16
ENCSW: D14.1 ENC1.2
GND: BOOT1.1 C1.1 C2.1 C3.1 C4.1 C5.1 C6.1 C7.1 C8.1 C9.1 C10.1 C11.1 C12.1 C13.1 C14.1 C15.1 C16.1 ENC1.C J1.4 J4.0 RST1.1 U1.4 U2.19 U2.57 Y1.2 Y1.4
NetC15_2: C15.2 U2.20 Y1.1
NetC16_2: C16.2 R9.1 Y1.3
NetD1_1: D1.1 SW1.2
NetD2_1: D2.1 SW2.2
NetD3_1: D3.1 SW3.2
NetD4_1: D4.1 SW4.2
NetD5_1: D5.1 SW5.2
NetD6_1: D6.1 SW6.2
NetD7_1: D7.1 SW7.2
NetD8_1: D8.1 SW8.2
NetD9_1: D9.1 SW9.2
NetD10_1: D10.1 SW10.2
NetD11_1: D11.1 SW11.2
NetD12_1: D12.1 SW12.2
NetD13_1: D13.1 SW13.2
NetD15_1: D15.1 SW14.2
NetD16_1: D16.1 SW15.2
NetD17_1: D17.1 SW16.2
NetD18_1: D18.1 SW17.2
NetD19_1: D19.1 SW18.2
NetD20_1: D20.1 SW19.2
NetD21_1: D21.1 SW20.2
NetD22_1: D22.1 SW21.2
NetD23_1: D23.1 SW22.2
NetD24_1: D24.1 SW23.2
NetD25_1: D25.1 SW24.2
NetD26_1: D26.1 SW25.2
NetD27_1: D27.1 SW26.2
NetD28_1: D28.1 SW27.2
NetD29_1: D29.1 SW28.2
NetD30_1: D30.1 SW29.2
NetD31_1: D31.1 SW30.2
NetD32_1: D32.1 SW31.2
NetD33_1: D33.1 SW32.2
NetD34_1: D34.1 SW33.2
NetD35_1: D35.1 SW34.2
NetD36_1: D36.1 SW35.2
NetD37_1: D37.1 SW36.2
NetD38_1: D38.1 SW37.2
NetD39_1: D39.1 SW38.2
NetD40_1: D40.1 SW39.2
NetD41_1: D41.1 SW40.2
NetD42_1: D42.1 SW41.2
NetD43_1: D43.1 SW42.2
NetD44_1: D44.1 SW43.2
NetD45_1: D45.1 SW44.2
NetD46_1: D46.1 SW45.2
NetD47_1: D47.1 SW46.2
NetD48_1: D48.1 SW47.2
NetD49_1: D49.1 SW48.2
NetD50_1: D50.1 SW49.2
NetD51_1: D51.1 SW50.2
NetD52_1: D52.1 SW51.2
NetD53_1: D53.1 SW52.2
NetD54_1: D54.1 SW53.2
NetD55_1: D55.1 SW54.2
NetD56_1: D56.1 SW55.2
NetD57_1: D57.1 SW56.2
NetD58_1: D58.1 SW57.2
NetD59_1: D59.1 SW58.2
NetD60_1: D60.1 SW59.2
NetD61_1: D61.1 SW60.2
NetD62_1: D62.1 SW61.2
NetD63_1: D63.1 SW62.2
NetD64_1: D64.1 SW63.2
NetD65_1: D65.1 SW64.2
NetD66_1: D66.1 SW65.2
NetD67_1: D67.1 SW66.2
NetD68_1: D68.1 SW67.2
NetD69_1: D69.1 SW68.2
NetD70_1: D70.1 SW69.2
NetD71_1: D71.1 SW70.2
NetD72_1: D72.1 SW71.2
NetD73_1: D73.1 SW72.2
NetD74_1: D74.1 SW73.2
NetD75_1: D75.1 SW74.2
NetD76_1: D76.1 SW75.2
NetD77_1: D77.1 SW76.2
NetD78_1: D78.1 SW77.2
NetD79_1: D79.1 SW78.2
NetENC1_A: ENC1.A R2.2 R4.1
NetENC1_B: ENC1.B R3.2 R5.1
NetR7_1: R7.1 U2.47
NetR8_1: R8.1 U2.46
NetR9_2: R9.2 U2.21
QSPI_SCLK: U1.6 U2.52
QSPI_SD0: U1.5 U2.53
QSPI_SD1: U1.2 U2.55
QSPI_SD2: U1.3 U2.54
QSPI_SD3: U1.7 U2.51
QSPI_SS: R6.2 U1.1 U2.56
Row1: ENC1.1 SW1.1 SW2.1 SW3.1 SW4.1 SW5.1 SW6.1 SW7.1 SW8.1 SW9.1 SW10.1 SW11.1 SW12.1 SW13.1 SW14.1 SW15.1 SW16.1 U2.6
Row2: SW17.1 SW18.1 SW19.1 SW20.1 SW21.1 SW22.1 SW23.1 SW24.1 SW25.1 SW26.1 SW27.1 SW28.1 SW29.1 SW30.1 SW31.1 SW32.1 SW33.1 U2.7
Row3: SW34.1 SW35.1 SW36.1 SW37.1 SW38.1 SW39.1 SW40.1 SW41.1 SW42.1 SW43.1 SW44.1 SW45.1 SW46.1 SW47.1 SW48.1 SW49.1 U2.8
Row4: SW50.1 SW51.1 SW52.1 SW53.1 SW54.1 SW55.1 SW56.1 SW57.1 SW58.1 SW59.1 SW60.1 SW61.1 SW62.1 SW63.1 SW64.1 SW65.1 U2.9
Row5: SW66.1 SW67.1 SW68.1 SW69.1 SW70.1 SW71.1 SW72.1 SW73.1 SW74.1 SW75.1 SW76.1 SW77.1 SW78.1
RUN: R10.2 RST1.2 U2.26
SWCLK: J2.0 U2.24
SWD: J3.0 U2.25
USB_BOOT: BOOT1.2 R6.1
USB_CONN_N: J1.2 R8.2
USB_CONN_P: J1.3 R7.2
pads on no net: ENC1.3 ENC1.4 J1.5 J1.6 SW1.MH1 SW1.MH2 SW1.MH3 SW1.MH4 SW1.MH5 SW2.MH1 SW2.MH2 SW2.MH3 SW2.MH4 SW2.MH5 SW3.MH1 SW3.MH2 SW3.MH3 SW3.MH4 SW3.MH5 SW4.MH1 SW4.MH2 SW4.MH3 SW4.MH4 SW4.MH5 SW5.MH1 SW5.MH2 SW5.MH3 SW5.MH4 SW5.MH5 SW6.MH1 SW6.MH2 SW6.MH3 SW6.MH4 SW6.MH5 SW7.MH1 SW7.MH2 SW7.MH3 SW7.MH4 SW7.MH5 SW8.MH1 SW8.MH2 SW8.MH3 SW8.MH4 SW8.MH5 SW9.MH1 SW9.MH2 SW9.MH3 SW9.MH4 SW9.MH5 SW10.MH1 SW10.MH2 SW10.MH3 SW10.MH4 SW10.MH5 SW11.MH1 SW11.MH2 SW11.MH3 SW11.MH4 SW11.MH5 SW12.MH1 SW12.MH2 SW12.MH3 SW12.MH4 SW12.MH5 SW13.MH1 SW13.MH2 SW13.MH3 SW13.MH4 SW13.MH5 SW14.MH1 SW14.MH2 SW14.MH3 SW14.MH4 SW14.MH5 SW15.MH1 SW15.MH2 SW15.MH3 SW15.MH4 SW15.MH5 SW16.MH1 SW16.MH2 SW16.MH3 SW16.MH4 SW16.MH5 SW17.MH1 SW17.MH2 SW17.MH3 SW17.MH4 SW17.MH5 SW18.MH1 SW18.MH2 SW18.MH3 SW18.MH4 SW18.MH5 SW19.MH1 SW19.MH2 SW19.MH3 SW19.MH4 SW19.MH5 SW20.MH1 SW20.MH2 SW20.MH3 SW20.MH4 SW20.MH5 SW21.MH1 SW21.MH2 SW21.MH3 SW21.MH4 SW21.MH5 SW22.MH1 SW22.MH2 SW22.MH3 SW22.MH4 SW22.MH5 SW23.MH1 SW23.MH2 SW23.MH3 SW23.MH4 SW23.MH5 SW24.MH1 SW24.MH2 SW24.MH3 SW24.MH4 SW24.MH5 SW25.MH1 SW25.MH2 SW25.MH3 SW25.MH4 SW25.MH5 SW26.MH1 SW26.MH2 SW26.MH3 SW26.MH4 SW26.MH5 SW27.MH1 SW27.MH2 SW27.MH3 SW27.MH4 SW27.MH5 SW28.MH1 SW28.MH2 SW28.MH3 SW28.MH4 SW28.MH5 SW29.MH1 SW29.MH2 SW29.MH3 SW29.MH4 SW29.MH5 SW30.MH1 SW30.MH2 SW30.MH3 SW30.MH4 SW30.MH5 SW31.MH1 SW31.MH2 SW31.MH3 SW31.MH4 SW31.MH5 SW32.MH1 SW32.MH2 SW32.MH3 SW32.MH4 SW32.MH5 SW33.MH1 SW33.MH2 SW33.MH3 SW33.MH4 SW33.MH5 SW34.MH1 SW34.MH2 SW34.MH3 SW34.MH4 SW34.MH5 SW35.MH1 SW35.MH2 SW35.MH3 SW35.MH4 SW35.MH5 SW36.MH1 SW36.MH2 SW36.MH3 SW36.MH4 SW36.MH5 SW37.MH1 SW37.MH2 SW37.MH3 SW37.MH4 SW37.MH5 SW38.MH1 SW38.MH2 SW38.MH3 SW38.MH4 SW38.MH5 SW39.MH1 SW39.MH2 SW39.MH3 SW39.MH4 SW39.MH5 SW40.MH1 SW40.MH2 SW40.MH3 SW40.MH4 SW40.MH5 SW41.MH1 SW41.MH2 SW41.MH3 SW41.MH4 SW41.MH5 SW42.MH1 SW42.MH2 SW42.MH3 SW42.MH4 SW42.MH5 SW43.MH1 SW43.MH2 SW43.MH3 SW43.MH4 SW43.MH5 SW44.MH1 SW44.MH2 SW44.MH3 SW44.MH4 SW44.MH5 SW45.MH1 SW45.MH2 SW45.MH3 SW45.MH4 SW45.MH5 SW46.MH1 SW46.MH2 SW46.MH3 SW46.MH4 SW46.MH5 SW47.MH1 SW47.MH2 SW47.MH3 SW47.MH4 SW47.MH5 SW48.MH1 SW48.MH2 SW48.MH3 SW48.MH4 SW48.MH5 SW49.MH1 SW49.MH2 SW49.MH3 SW49.MH4 SW49.MH5 SW50.MH1 SW50.MH2 SW50.MH3 SW50.MH4 SW50.MH5 SW51.MH1 SW51.MH2 SW51.MH3 SW51.MH4 SW51.MH5 SW52.MH1 SW52.MH2 SW52.MH3 SW52.MH4 SW52.MH5 SW53.MH1 SW53.MH2 SW53.MH3 SW53.MH4 SW53.MH5 SW54.MH1 SW54.MH2 SW54.MH3 SW54.MH4 SW54.MH5 SW55.MH1 SW55.MH2 SW55.MH3 SW55.MH4 SW55.MH5 SW56.MH1 SW56.MH2 SW56.MH3 SW56.MH4 SW56.MH5 SW57.MH1 SW57.MH2 SW57.MH3 SW57.MH4 SW57.MH5 SW58.MH1 SW58.MH2 SW58.MH3 SW58.MH4 SW58.MH5 SW59.MH1 SW59.MH2 SW59.MH3 SW59.MH4 SW59.MH5 SW60.MH1 SW60.MH2 SW60.MH3 SW60.MH4 SW60.MH5 SW61.MH1 SW61.MH2 SW61.MH3 SW61.MH4 SW61.MH5 SW62.MH1 SW62.MH2 SW62.MH3 SW62.MH4 SW62.MH5 SW63.MH1 SW63.MH2 SW63.MH3 SW63.MH4 SW63.MH5 SW64.MH1 SW64.MH2 SW64.MH3 SW64.MH4 SW64.MH5 SW65.MH1 SW65.MH2 SW65.MH3 SW65.MH4 SW65.MH5 SW66.MH1 SW66.MH2 SW66.MH3 SW66.MH4 SW66.MH5 SW67.MH1 SW67.MH2 SW67.MH3 SW67.MH4 SW67.MH5 SW68.MH1 SW68.MH2 SW68.MH3 SW68.MH4 SW68.MH5 SW69.MH1 SW69.MH2 SW69.MH3 SW69.MH4 SW69.MH5 SW70.MH1 SW70.MH2 SW70.MH3 SW70.MH4 SW70.MH5 SW71.MH1 SW71.MH2 SW71.MH3 SW71.MH4 SW71.MH5 SW72.MH1 SW72.MH2 SW72.MH3 SW72.MH4 SW72.MH5 SW73.MH1 SW73.MH2 SW73.MH3 SW73.MH4 SW73.MH5 SW74.MH1 SW74.MH2 SW74.MH3 SW74.MH4 SW74.MH5 SW75.MH1 SW75.MH2 SW75.MH3 SW75.MH4 SW75.MH5 SW76.MH1 SW76.MH2 SW76.MH3 SW76.MH4 SW76.MH5 SW77.MH1 SW77.MH2 SW77.MH3 SW77.MH4 SW77.MH5 SW78.MH1 SW78.MH2 SW78.MH3 SW78.MH4 SW78.MH5 U2.14 U2.38 U2.39 U2.40 U2.41